# Altium PCB BreakoutPcb.PcbDoc
Units mm, origin at the board's own origin, x right, y up, seen from the top; angles counter-clockwise.
Board outline 50 x 40 mm, 2 copper layers (Top Layer, Bottom Layer); 27 components, 24 nets, 103 pads, 0 vias.
Unrouted connection lines stored in the file: 70.
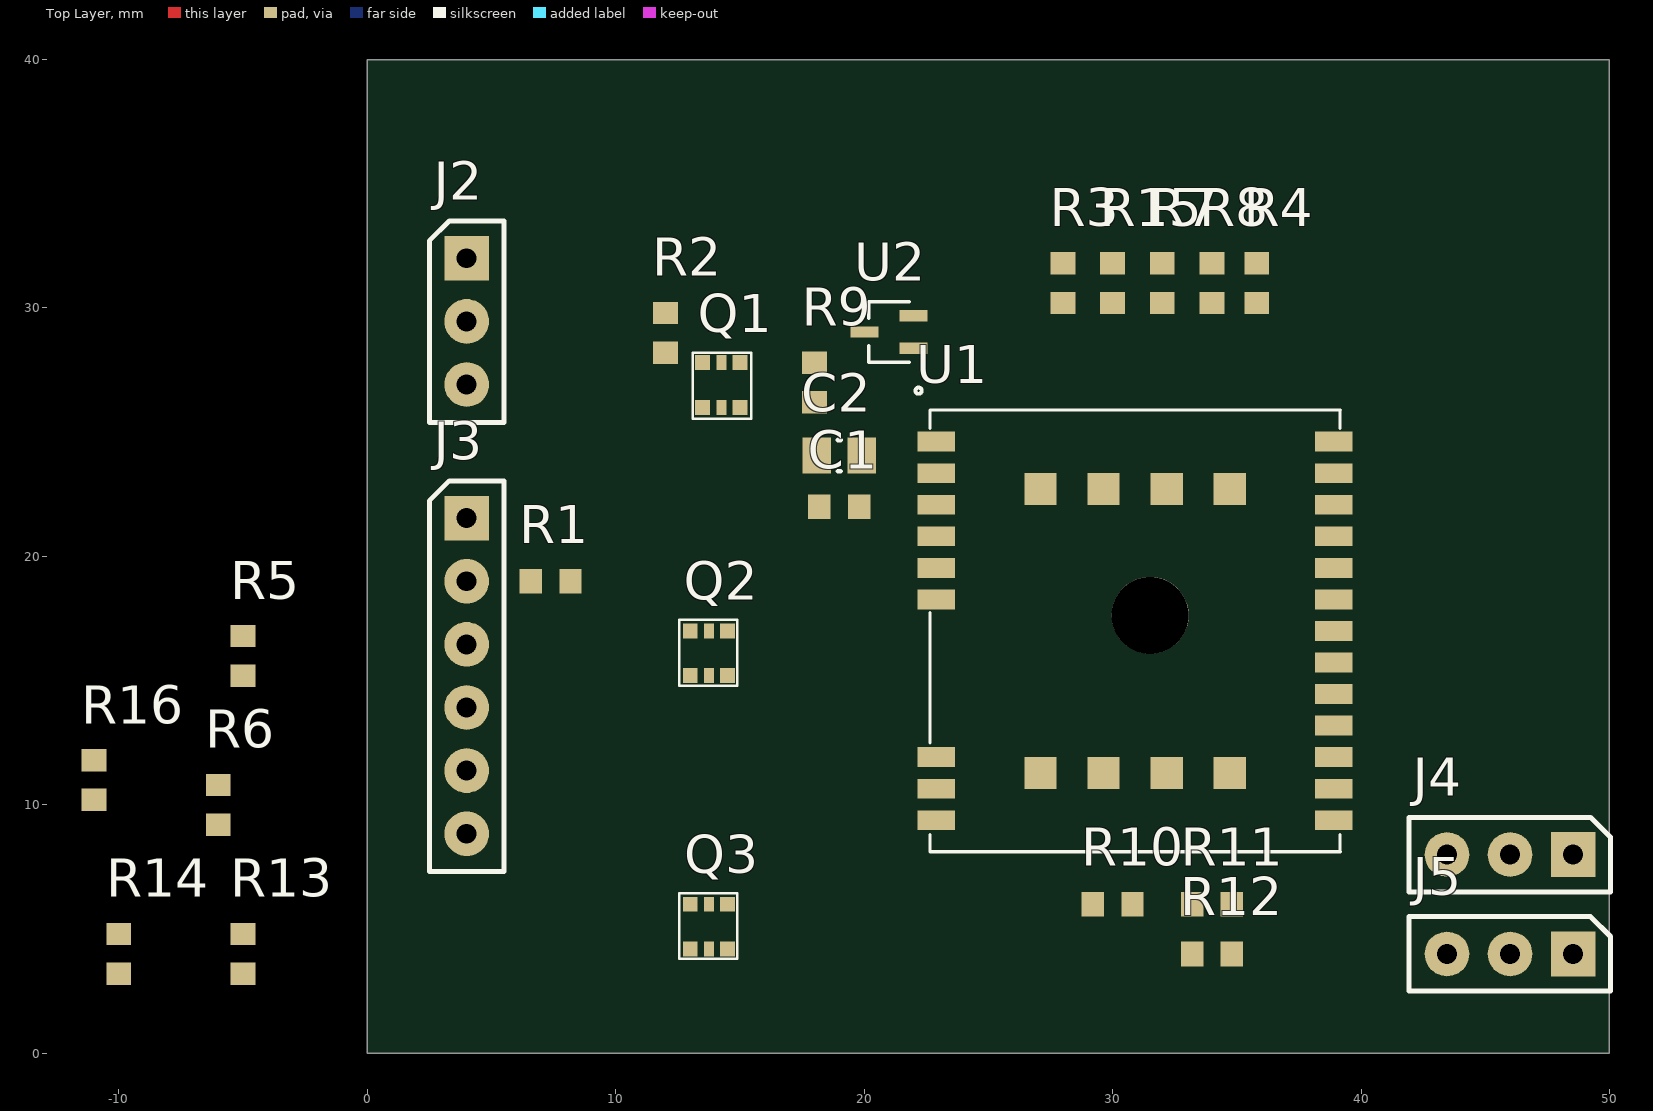
[diagram p0: Top Layer view]
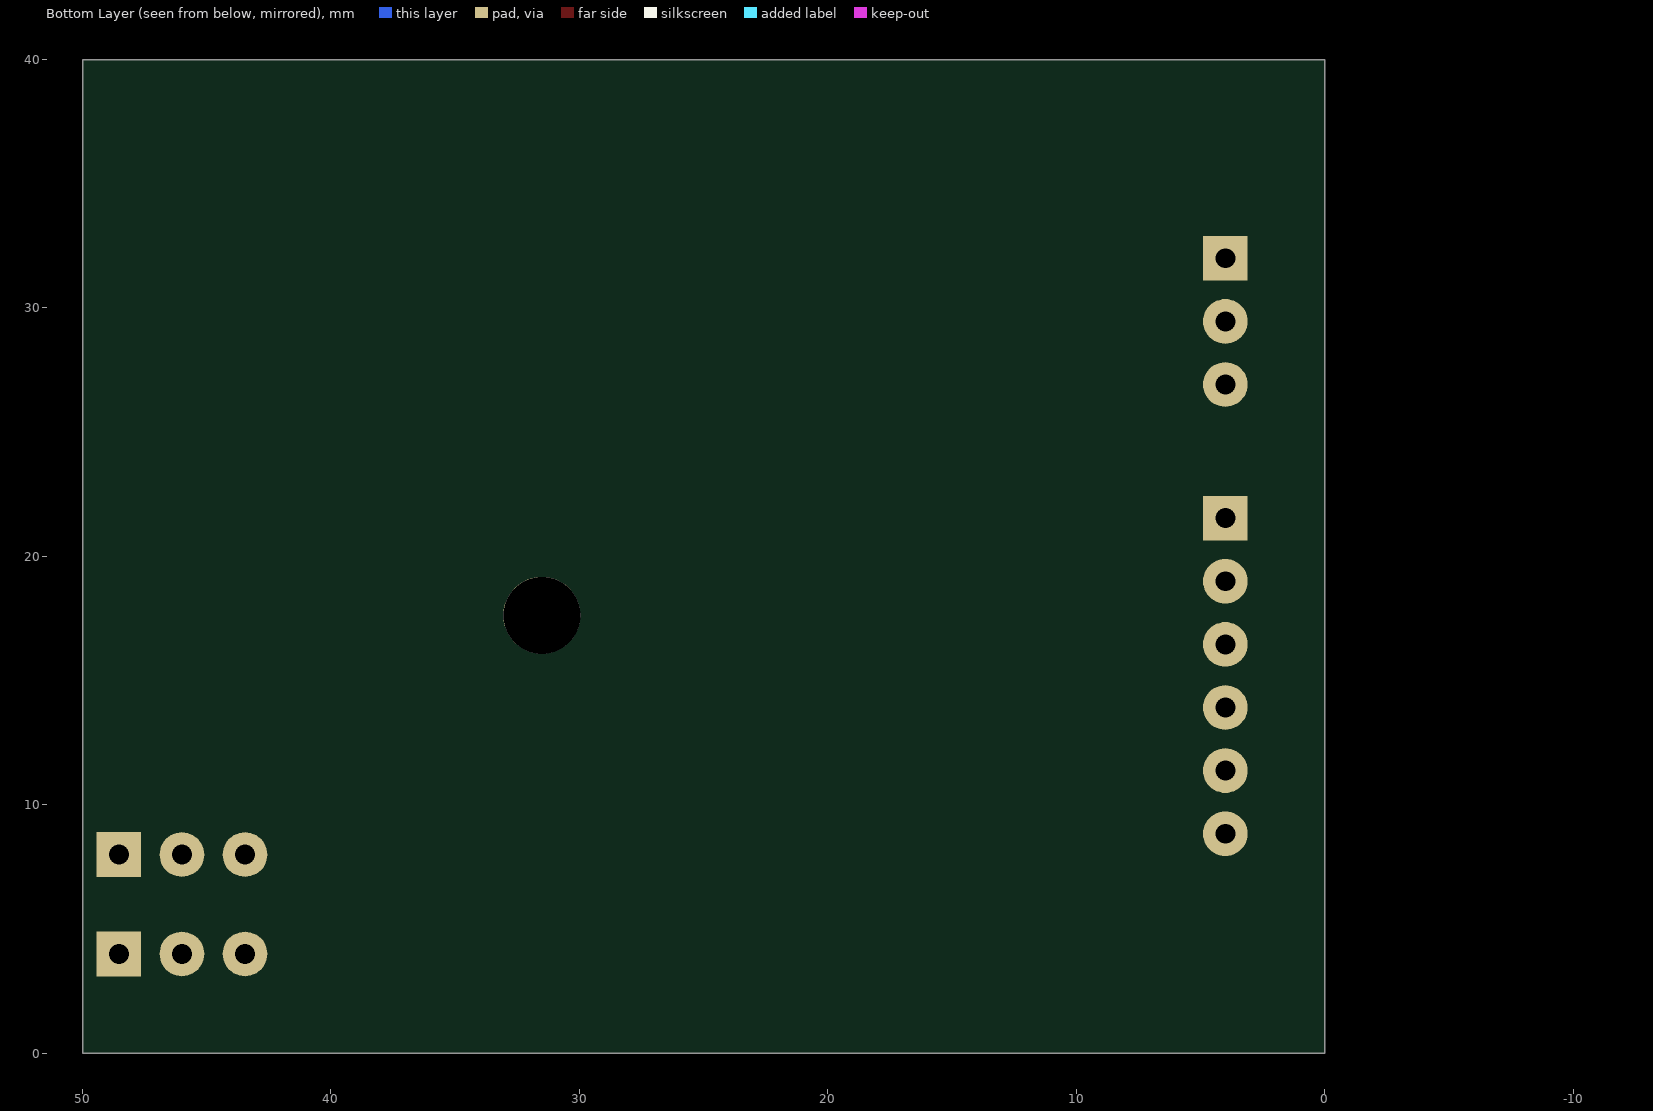
[diagram p1: Bottom Layer view, seen from below]

## Layer stack, top to bottom
Top Solder: solder mask 0.0102, Solder Resist, Dk 3.5
Top Layer: signal copper 0.0356
Dielectric 1: dielectric 0.32, FR-4, Dk 4.8
Bottom Layer: signal copper 0.0356
Bottom Solder: solder mask 0.0102, Solder Resist, Dk 3.5

## Board outline
0,0 50,0 50,40 0,40

## Design rules (kind name [scope] priority, off if disabled: settings)
Clearance Clearance_Text [IsText] p1: gap=0
Clearance Clearance_Poly [All vs InPolygon] p2: gap=0.4
Clearance [All] p3: gap=0.25
HoleSize [All] p1: absolutevalues=TRUE maxlimit=5 minlimit=0.025 maxpercent=80.000 minpercent=20.000
PolygonConnect [All] p1: connectstyle=Relief reliefconductorwidth=0.254 reliefentries=4 polygonreliefangle="90 Angle" airgapwidth=0.254
RoutingVias [All] p1: holewidth=0.711 width=1.27 viastyle="Through Hole" minholewidth=0.711 minwidth=1.27 maxholewidth=0.711 maxwidth=1.27
SolderMaskExpansion [All] p1: expansion=0.102
Width [All] p1: maxlimit=2 minlimit=0.3 preferedwidth=0.4
29 further rules are at their usual default settings.

## Components (designator, comment, footprint, x,y, rotation, side; value= is the part's Value field where it differs from the comment)
C1 "100nF" CAPC0603(1608)55_N 19,22 r180 top
C2 "47nF" CAPC0805(2012)100_N 19,24.054 r180 top
J2 "Header1x3" HDRV3W64P254_1X3_762X254X900B 4,29.46 r0 top
J3 "Header1x6" HDRV6W64P254_1X6_1524X254X900B 4,15.19 r0 top
J4 "Header1x3" HDRV3W64P254_1X3_762X254X900B 46,8 r270 top
J5 "Header1x3" HDRV3W64P254_1X3_762X254X900B 46,4 r270 top
Q1 "BSS138" PCBComponent_1 15,26 r90 top
Q2 "BSS138" PCBComponent_1 13,17 r270 top
Q3 "BSS138" PCBComponent_1 13,6 r270 top
R1 "10k" RESC0603(1608)_N 7.379,19 r0 top
R2 "10k" RESC0603(1608)_N 12,29 r90 top
R3 "10k" RESC0603(1608)_N 28,31 r90 top
R4 "10k" RESC0603(1608)_N 35.804,31 r90 top
R5 "10k" RESC0603(1608)_N -5,16 r90 top
R6 "10k" RESC0603(1608)_N -6,10 r270 top
R7 "10k" RESC0603(1608)_N 32,31 r90 top
R8 "10k" RESC0603(1608)_N 34,31 r90 top
R9 "0R" RESC0603(1608)_N 18,27 r90 top
R10 "10k" RESC0603(1608)_N 30,6 r180 top
R11 "2k2" RESC0603(1608)_N 34,6 r180 top
R12 "2k2" RESC0603(1608)_N 34,4 r180 top
R13 "10k" RESC0603(1608)_N -5,4 r90 top
R14 "10k" RESC0603(1608)_N -10,4 r270 top
R15 "10k" RESC0603(1608)_N 30,31 r90 top
R16 "10k" RESC0603(1608)_N -11,11 r90 top
U1 "A2235-H" XCVR_A2235-H 30.907,17 r0 top
U2 "MAX809SEXR-T" 21-0075D 21,29.033 r90 top

## Footprints (in the part's own frame and the unit in brackets; to place one, negate y for a bottom-side part, rotate by r counter-clockwise, add the part's x,y. Pads: shape width x height; smd on the part's side, far side on the other; paste and mask are expansions set on the pad)
21-0075D [mil]
  rect 18x44 smd paste-1000 mask-1000: 1(-25.59,-39) 2(25.59,-39) 3(0,39)
  silkscreen extent -98,-52 48,32
CAPC0603(1608)55_N [mm] "Chip Capacitor, Body 1.6x0.8mm, Height 0.55mm, IPC Medium Density"
  rect 0.9x1 smd: 1(-0.8,0) 2(0.8,0)
  body extent -0.87,-0.48 0.88,0.47, height 0.55
CAPC0805(2012)100_N [mm] "Chip Capacitor, Body 2.0x1.2mm, Height 1.0mm, IPC Medium Density"
  rect 1.15x1.45 smd: 1(-0.9,0) 2(0.9,0)
  silkscreen extent -0.05,-0.62 0.05,0.62, body extent -1.1,-0.72 1.1,0.73, height 1
HDRV3W64P254_1X3_762X254X900B [mm] "Header 1x3"
  rect 1.8x1.8 hole 0.8: 1(0,2.54)
  round 1.8 hole 0.8: 2(0,0) 3(0,-2.54)
  silkscreen extent -1.5,-4.07 1.5,4.04
HDRV6W64P254_1X6_1524X254X900B [mm] "Header 1x6"
  rect 1.8x1.8 hole 0.8: 1(0,6.35)
  round 1.8 hole 0.8: 2(0,3.81) 3(0,1.27) 4(0,-1.27)
  round 1.8 hole 0.8 unplated: 5(0,-3.81) 6(0,-6.35)
  silkscreen extent -1.5,-7.87 1.5,7.85
PCBComponent_1 [mm]
  rect 0.6x0.6 smd: 1(0,1.5) 3(0,0) 4(1.8,0) 6(1.8,1.5)
  rect 0.6x0.4 smd: 2(0,0.75) 5(1.8,0.75)
  silkscreen extent -0.45,-0.45 2.2,1.9
RESC0603(1608)_N [mm] "Chip Resistor, Body 1.6x0.8mm, IPC Medium Density"
  rect 0.9x1 smd: 1(-0.8,0) 2(0.8,0)
  body extent -0.85,-0.47 0.85,0.47, height 0.6
XCVR_A2235-H [mm]
  rect 1.5x0.8 smd paste-25.4 mask-25.4: 1(-8,7.62) 2(-8,6.35) 3(-8,5.08) 4(-8,3.81) 5(-8,2.54) 6(-8,1.27) 7(-8,-5.08) 8(-8,-6.35) 9(-8,-7.62) 10(8,-7.62) 11(8,-6.35) 12(8,-5.08) 13(8,-3.81) 14(8,-2.54) 15(8,-1.27) 16(8,0) 17(8,1.27) 18(8,2.54) 19(8,3.81) 20(8,5.08) 21(8,6.35) 22(8,7.62)
  rect 1.3x1.3 smd paste-25.4 mask-25.4: 23(-3.81,5.715) 24(-1.27,5.715) 25(1.27,5.715) 26(3.81,5.715) 27(-3.81,-5.715) 28(-1.27,-5.715) 29(1.27,-5.715) 30(3.81,-5.715)
  round 3.1 hole 3.1 unplated: None(0.605,0.63)
  silkscreen extent -8.26,-8.9 8.25,8.9

## Part data
C1: library part 3028, "X7R 50V 5%"
C2: library part 2446, "X7R"
J2 J4 J5: library part 2430
J3: library part 2433
Q1 Q2 Q3: "FET SM NCH 50V 220mA SOT23-3L"
R1 R2 R3 R4 R5 R6 R7 R8 R10 R13 R14 R15 R16: library part 2444, "0.1W 1% Thick film resistor"
R9: library part 3186, "0.1W 1% Thick film resistor"
R11 R12: library part 3449, "0.1W 1% Thick film resistor"
U1: "Gps Module, Mini Outline w/ Ant"
U2: "PMIC - system monitor Maxim Integrated MAX809SEXR+T Reset/power-on reset SC 70 3"

## Nets (pads, with @x,y where several pads share a name; then routed paths per layer and width w, separated by ;. In a path a pad name is that pad's centre, name@x,y a point inside that pad or via, vN(x,y) a via of type N, cw(c..) or ccw(c..) an arc to the next point about the centre after c; other vN are vias at no path point)
3V3: J2.3 Q1.2 Q1.5 Q2.2 Q2.5 Q3.2 Q3.5 R3.2 R4.2 R7.2 R8.2 R15.2 R16.2
5V: J2.1 R1.2 R2.2 R5.2 R6.2 R13.2 R14.2 | length 0.3
  Top Layer w0.3: J2.1 J2.1@4.2,31.8
GND: J2.2 J4.1 J5.1
NetC1_1: C1.1 C2.1 U1.6 U1.9 U1.20 U1.23 U1.24 U1.25 U1.26 U1.27 U1.28 U1.29 U1.30 U2.1
NetC1_2: C1.2 C2.2 R9.1 U1.3
NetJ3_1: J3.1 Q1.3 R1.1
NetJ3_2: J3.2 Q1.6 R2.1
NetJ3_3: J3.3 Q2.3 R5.1
NetJ3_4: J3.4 Q2.6 R6.1
NetJ3_5: J3.5 Q3.3 R13.1
NetJ3_6: J3.6 Q3.6 R14.1
NetJ4_2: J4.2 U1.17
NetJ4_3: J4.3 R11.1
NetJ5_2: J5.2 U1.18
NetJ5_3: J5.3 R12.1
NetQ1_1: Q1.1 R4.1 U1.4
NetQ1_4: Q1.4 R3.1 U1.1 U2.2
NetQ2_1: Q2.1 R8.1 U1.21
NetQ2_4: Q2.4 R7.1 U1.19
NetQ3_1: Q3.1 R16.1 U1.16
NetQ3_4: Q3.4 R15.1 U1.22
NetR9_2: R9.2 U2.3
NetR10_1: R10.1 R11.2 R12.2 U1.5
NetR10_2: R10.2 U1.7
pads on no net: U1.2 U1.8 U1.10 U1.11 U1.12 U1.13 U1.14 U1.15 U1.None